# Altium PCB EVB_MBD_AK376xE_V1.0.0.PcbDoc (part 4 of 5)
Units mil, origin at the board's own origin, x right, y up, seen from the top; angles counter-clockwise.
Board outline 7060.01 x 5460.01 mil, 4 copper layers (Top, Layer 1, Layer 2, Bottom), stack 5.512 mil thick; 344 components, 305 nets, 1421 pads, 1325 vias.
Unrouted connection lines stored in the file: 947.
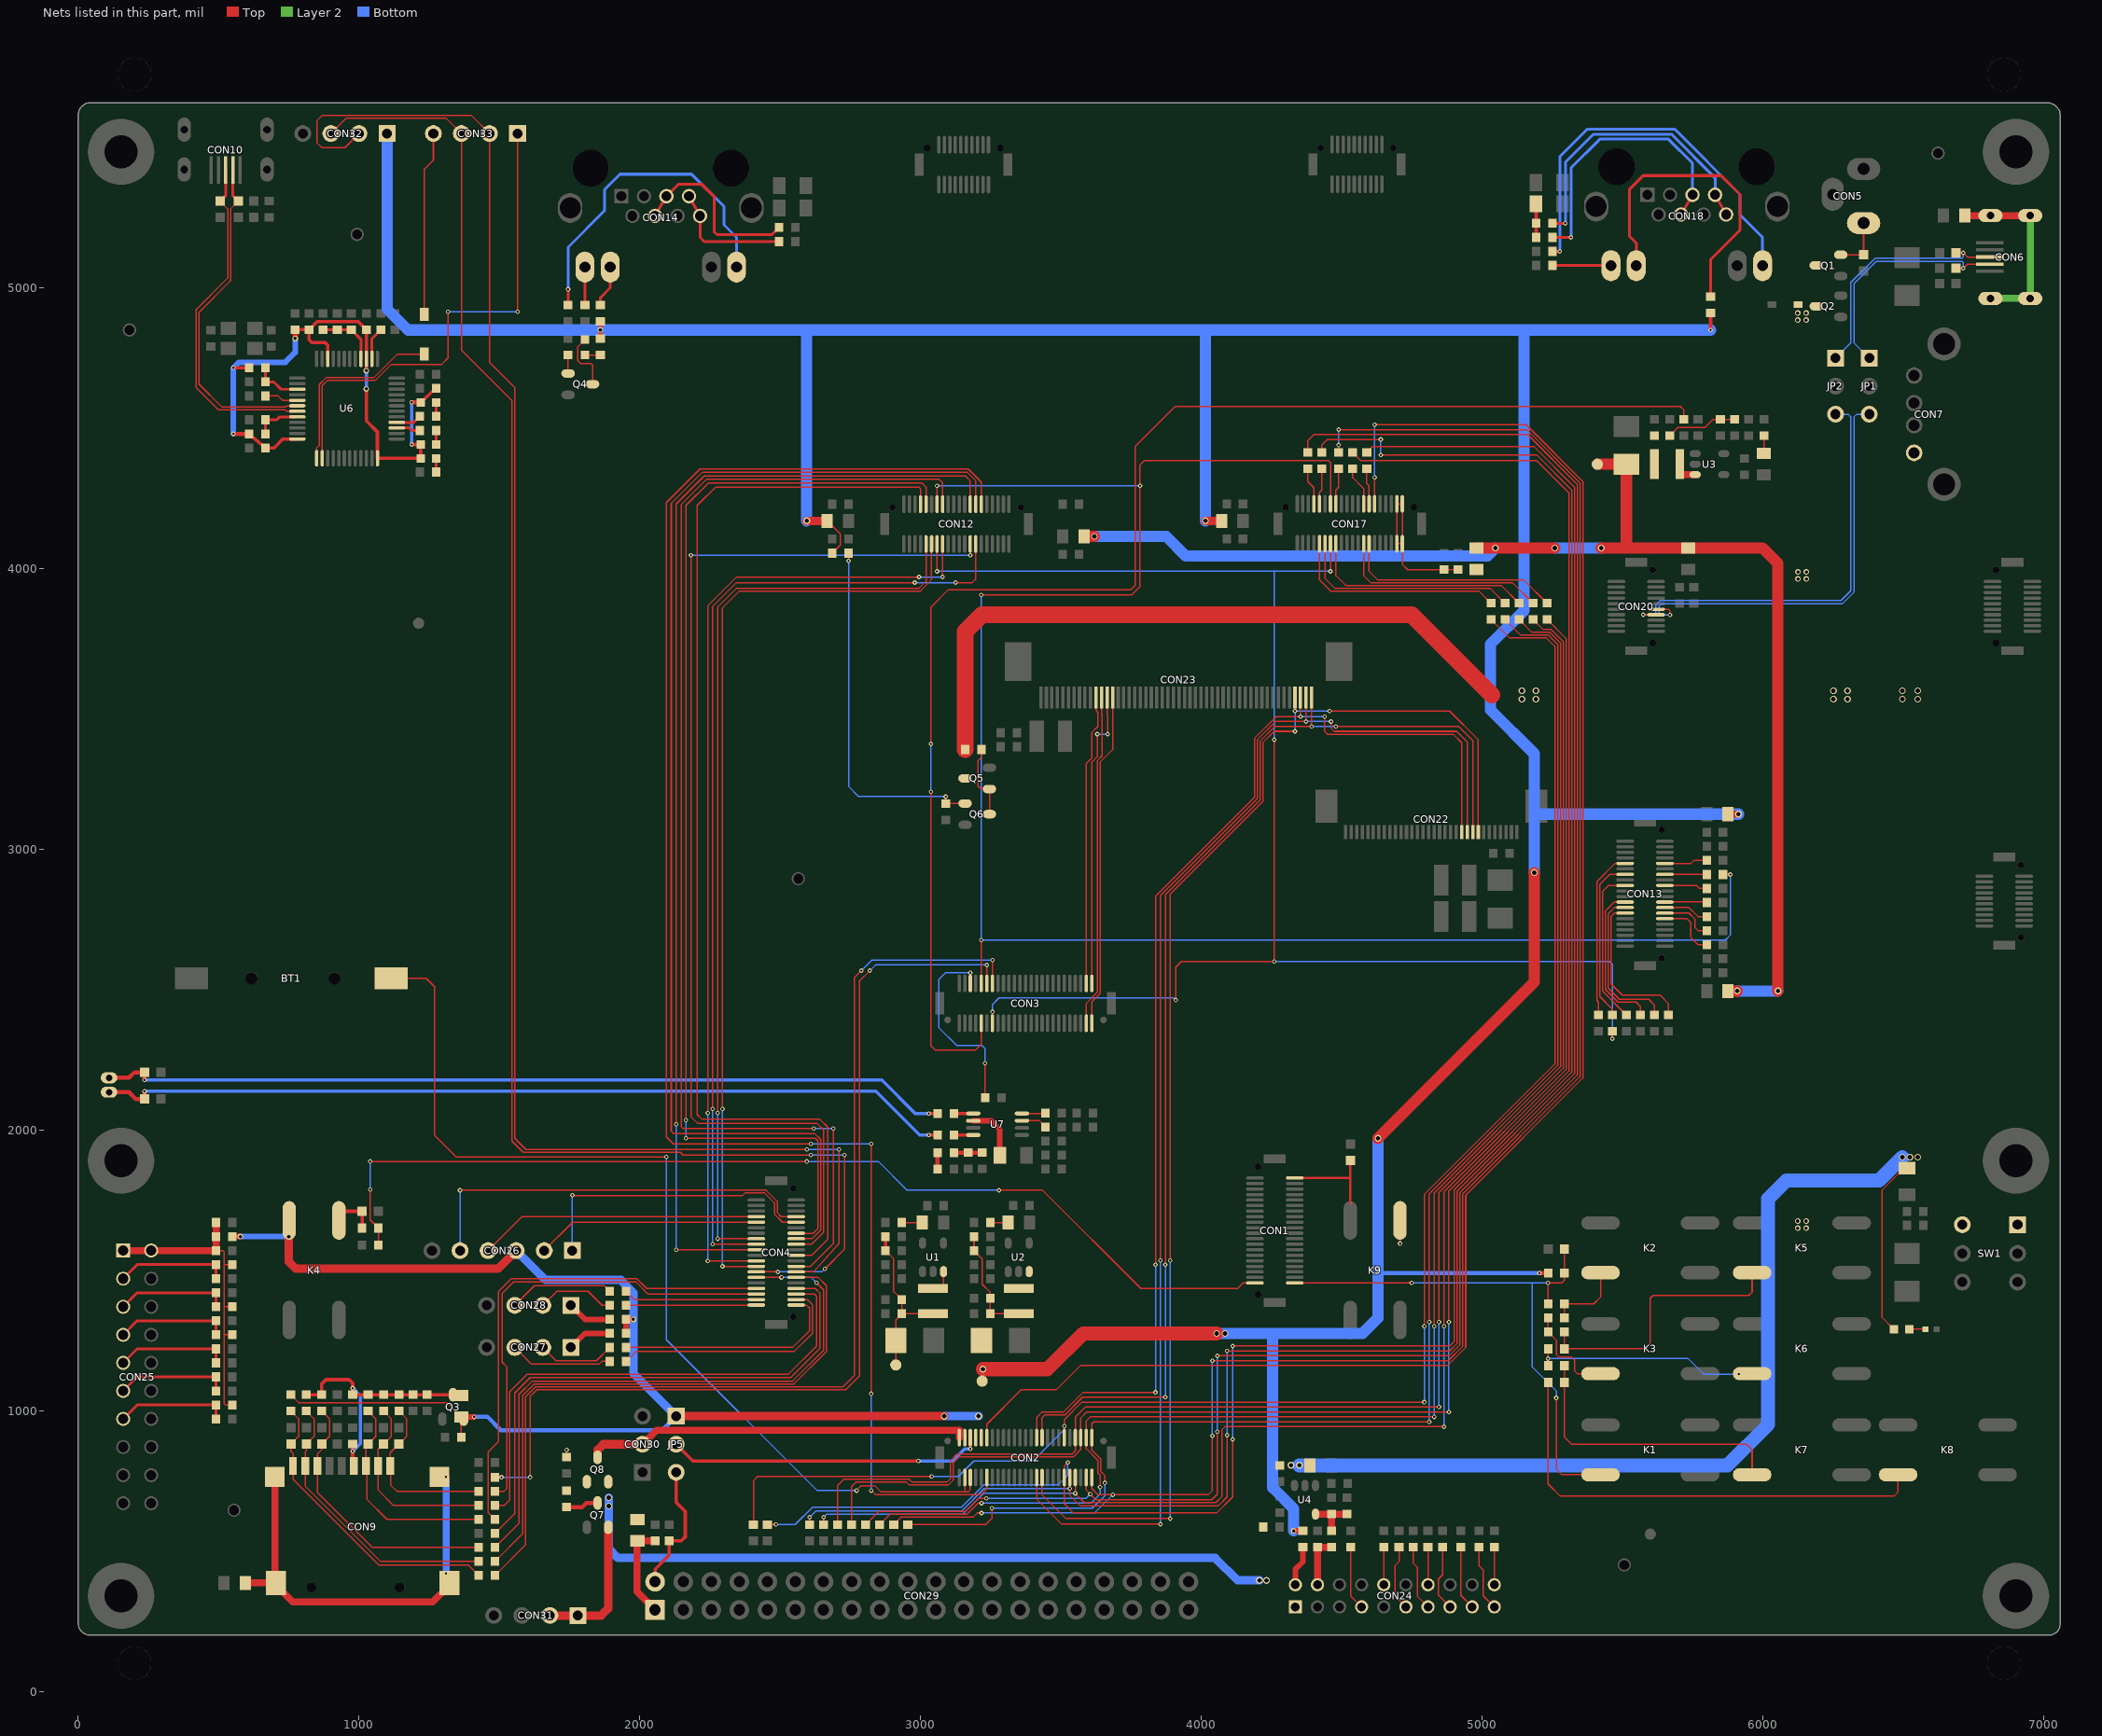
[diagram p6: the nets of this part, all layers, seen from the top]

## Via types
v1: diameter 15.75, hole 7.87, Top to Bottom, 1261 vias
v2: diameter 24, hole 16, Top to Bottom, 43 vias
v3: diameter 20, hole 12, Top to Bottom, 21 vias

## Nets (pads, with @x,y where several pads share a name; then routed paths per layer and width w, separated by ;. In a path a pad name is that pad's centre, name@x,y a point inside that pad or via, vN(x,y) a via of type N, cw(c..) or ccw(c..) an arc to the next point about the centre after c; other vN are vias at no path point) (continued)
NETC72_1: C72.1 C73.1 CON17.37 CON17.38 CON17.39 CON17.40 FB23.2 | length 602.7
  Top w5: CON17.39@4716.58,4088.58 CON17.37@4696.89,4088.58 CON17.38@4696.89,4230.32 CON17.40@4716.58,4230.32 4716.57,4015 4735.57,3996 C73.1@4865,3996 C72.1@4915,3996
NETC74_1: C74.1 R83.1 R84.1 | length 120.4
  Top w12: C74.1@5192.5,5300 5193.5,5299 R84.1@5193.5,5230 R83.1@5193.5,5180
NETC82_1: C82.1 CON24.4 FB27.1 | length 184.7
  Top w25: CON24.4@4414.41,379.37 C82.1@4414.41,513.5 FB27.1@4465,513.5
NETC84_1: C84.1 C85.1 CON25.1 CON25.2 FB25.2 R87.2 R88.2 R89.2 R90.2 | length 1120.1
  Top w5: C85.1@491,1570 515,1570 520,1565 520,1520 ; R90.2@549,1020 525,1020 520,1025 520,1270 ; R89.2@549,1270 520,1270 ; R88.2@549,1370 520,1370 ; R87.2@549,1520 520,1520 ; 520,1270 520,1370 ; 520,1370 520,1520
  Top w25: CON25.1@160,1570 CON25.2@260,1570 C85.1@491,1570 FB25.2@491,1620 C84.1@491,1670
NETC86_1: C86.1 CON1.2 R116.2 | length 3656.8
  Top w5: v1(1040,1787.5) 1040,1679 R116.2@1069,1650 C86.1@1069,1590 ; v1(1040,1887.5) v1(2595,1887.5) ; v1(3280,1785) 3435,1785 3785,1435 4130.26,1435 4150,1454.74 CON1.2@4191.63,1454.74
  Bottom w5: v1(1040,1787.5) v1(1040,1887.5) ; v1(2595,1887.5) 2850,1887.5 2952.5,1785 v1(3280,1785)
NETC88_2: C88.2 CON29.1 FB28.2 | length 336.8
  Top w25: CON29.1@2055,290 1990,355 1990,501.66 1990,534 FB28.2@1992,536 C88.2@2055,536
NETCON1_1: CON1.1 E19.1 K1.1 R108.1 R135.2 | length 2014.9
  Top w5: CON1.1@4333.37,1454.74 v1(4750,1454.74) ; R135.2@5236,1380 v1(5236,1454.74) 5284.66,1454.74 5294,1463.94 R108.1@5294,1490 E19.1@5294,1575 ; v1(5265,1045) 5265,791.42 5285,771.42 K1.1@5422.83,771.42
  Bottom w5: v1(4750,1454.74) 5180,1454.74 ; v1(5236,1454.74) 5200,1454.74 5180,1454.74 ; v1(5265,1045) 5265,1070 5180,1155 5180,1454.74
NETCON2_39: CON2.39 R69.2 R134.2 | length 7549.3
  Top w5: R134.2@2455,594 v1(2485,594) ; v1(3525,815) 3512.3,802.3 CON2.39@3512.3,761.63 3512.3,667.7 3545,635 4055,635 4112.5,692.5 v1(4112.5,897.5) ; v1(4112.5,1230) 4885,1230 4902.5,1247.5 4902.5,1787.5 5320,2205 5320,4280 5195,4405 v1(4640,4405) ; R69.2@4430,4414 4430,4440 4450,4460 v1(4640,4460)
  Bottom w5: v1(2485,594) 2554,594 2615,655 3145,655 3225,735 3490,735 3525,770 v1(3525,815) ; v1(4112.5,897.5) v1(4112.5,1230) ; v1(4640,4405) v1(4640,4460)
NETCON2_40: CON2.40 R70.2 R133.2 | length 5918.1
  Top w5: R133.2@2405,594 2405,750 2420,765 v1(3040,765) ; v1(3512.3,945) CON2.40@3512.3,903.37 3512.3,967.3 3575,1030 v1(4795,1030) ; v1(4795,1300) 4795,1770 5260,2235 5260,3722.5 5230,3752.5 5098.5,3752.5 R70.2@5032.5,3818.5
  Bottom w5: v1(3040,765) 3135,765 3190,820 3400,820 3512.3,932.3 v1(3512.3,945) ; v1(4795,1030) v1(4795,1300)
NETCON2_41: CON2.41 R79.2 R132.2 | length 7031.7
  Top w5: R132.2@2605,594 v1(2605,620) ; CON2.41@3531.99,761.63 v1(3532,722) 3531.99,698.01 3570,660 4060,660 4092.5,692.5 v1(4092.5,912.5) ; v1(4092.5,1212.5) 4885,1212.5 4912.5,1240 4912.5,1782.5 5330,2200 5330,4290 5185,4435 4611,4435 R79.2@4590,4414
  Bottom w5: v1(2605,620) 2627.5,642.5 3147.5,642.5 3227,722 v1(3532,722) ; v1(4092.5,912.5) v1(4092.5,1212.5)
NETCON2_43: CON2.43 R80.2 R131.2 | length 5676.4
  Top w5: R131.2@2655,594 v1(2655,620) ; CON2.43@3551.67,761.63 3551.67,730.14 v1(3551.67,705) 3584.17,672.5 4052.5,672.5 4075,695 4075,932.5 4085,942.5 v1(4865,942.5) ; v1(4865,1300) 4865,1780 5300,2215 5300,3751 R80.2@5232.5,3818.5
  Bottom w5: v1(2655,620) 2665,630 3150,630 3225,705 v1(3551.67,705) ; v1(4865,942.5) v1(4865,1300)
NETCON2_44: CON2.44 R78.2 R130.2 | length 5564.4
  Top w5: R130.2@2705,594 2705,732.5 2727.5,755 2960,755 2970,745 3095,745 3107.5,757.5 3107.5,822.5 3130,845 3540,845 3551.67,856.67 CON2.44@3551.67,903.37 3551.67,976.67 3587.5,1012.5 v1(4847.5,1012.5) ; v1(4847.5,1315) 4847.5,1777.5 5290,2220 5290,3740 5247.5,3782.5 5218.5,3782.5 R78.2@5182.5,3818.5
  Bottom w5: v1(4847.5,1012.5) v1(4847.5,1315)
NETCON2_46: CON2.46 R77.2 R129.2 | length 6765.8
  Top w5: R129.2@2755,594 2755,730 2770,745 2950,745 2960,735 3100,735 3117.5,752.5 3117.5,815 3137.5,835 3545,835 3571.36,861.36 CON2.46@3571.36,903.37 3571.36,973.86 3592.5,995 v1(4882.5,995) ; R77.2@4540,4414 4569,4385 5195,4385 5310,4270 5310,2210 4882.5,1782.5 v1(4882.5,1315)
  Bottom w5: v1(4882.5,995) v1(4882.5,1315)
NETCON2_47: CON2.47 R68.2 R128.2 | length 7074.8
  Top w5: R128.2@2805,594 2851,640 3160,640 3207.5,687.5 v1(3235,687.5) ; CON2.47@3591.04,761.63 3591.04,716.46 v1(3605,702.5) 3625,682.5 4037.5,682.5 4057.5,702.5 v1(4057.5,925) ; v1(4057.5,1195) 4882.5,1195 4922.5,1235 4922.5,1777.5 5340,2195 5340,4300 5162.5,4477.5 4402.5,4477.5 4380,4455 R68.2@4380,4414
  Bottom w5: v1(3235,687.5) 3590,687.5 v1(3605,702.5) ; v1(4057.5,925) v1(4057.5,1195)
NETCON2_48: CON2.48 R75.2 R127.2 | length 5482
  Top w5: R127.2@2855,594 2891,630 3165,630 3205,670 v1(3217.5,670) ; v1(3640,727.5) 3640,770 3632.5,777.5 3632.5,822.5 3591.04,863.96 CON2.48@3591.04,903.37 3591.04,963.54 3605,977.5 v1(4830,977.5) ; v1(4830,1300) 4830,1775 5280,2225 5280,3735 5242.5,3772.5 5178.5,3772.5 R75.2@5132.5,3818.5
  Bottom w5: v1(3217.5,670) 3607.5,670 3640,702.5 v1(3640,727.5) ; v1(4830,977.5) v1(4830,1300)
NETCON2_49: CON2.49 R74.2 R126.2 | length 6952.7
  Top w5: R126.2@2905,594 2931,620 3187.5,620 3202.5,635 v1(3217.5,635) ; CON2.49@3610.73,761.63 3610.73,721.77 3632.5,700 v1(3685,700) 4025,700 4040,715 v1(4040,910) ; v1(4040,1177.5) 4880,1177.5 4932.5,1230 4932.5,1772.5 5350,2190 5350,4305 5160,4495 v1(4490,4495) ; R74.2@4490,4414 v1(4490,4440)
  Bottom w5: v1(3217.5,635) 3620,635 v1(3685,700) ; v1(4040,910) v1(4040,1177.5) ; v1(4490,4440) v1(4490,4495)
NETCON2_50: CON2.50 R71.2 R125.2 | length 5429.8
  Top w5: R125.2@2955,594 3232.5,594 3255,616.5 v1(3255,652.5) ; v1(3657.5,742.5) 3657.5,767.5 3642.5,782.5 3642.5,827.5 3610.73,859.27 CON2.50@3610.73,903.37 3610.73,953.23 3617.5,960 v1(4812.5,960) ; v1(4812.5,1315) 4812.5,1772.5 5270,2230 5270,3730 5237.5,3762.5 5138.5,3762.5 R71.2@5082.5,3818.5
  Bottom w5: v1(3255,652.5) 3612.5,652.5 3657.5,697.5 v1(3657.5,742.5) ; v1(4812.5,960) v1(4812.5,1315)
NETCON5_1: CON5.1 E1.1 Q1.S | length 194.4
  Top w5: Q1.S@6278.5,5118 E1.1@6360,5118 CON5.1@6360,5230.87
NETCON9_1: CON9.1 E5.1 R13.1 R20.2 | length 622.3
  Top w5: R13.1@1142.5,998.5 1170,971 1170,908.5 E5.1@1142.5,881 1111.52,850.02 CON9.1@1111.52,803.07 1112.5,802.09 1112.5,735 1135,712.5 R20.2@1426,712.5
NETCON9_2: CON9.2 E6.1 R14.1 R21.2 | length 693.3
  Top w5: R14.1@1087.5,998.5 1115,971 1115,908.5 E6.1@1087.5,881 1068.21,861.71 CON9.2@1068.21,803.07 1067.5,802.36 1067.5,717.5 1122.5,662.5 R21.2@1426,662.5
NETCON9_3: CON9.3 E7.1 R15.1 R22.2 | length 769
  Top w5: R15.1@1032.5,998.5 1060,971 1060,908.5 E7.1@1032.5,881 1024.9,873.4 CON9.3@1024.9,803.07 1027.5,800.47 1027.5,685 1100,612.5 R22.2@1426,612.5
NETCON9_7: CON9.7 E9.1 R17.1 R25.2 | length 975
  Top w5: R17.1@867.5,998.5 895,971 895,915 895,908.5 E9.1@867.5,881 867.5,860.83 851.67,845 CON9.7@851.67,803.07 852.5,802.24 852.5,707.5 1047.5,512.5 R25.2@1426,512.5
NETCON9_8: CON9.8 E10.1 R18.1 R26.2 | length 1020.5
  Top w5: R18.1@812.5,998.5 840,971 840,908.5 E10.1@812.5,881 812.5,856.63 808.37,852.5 CON9.8@808.37,803.07 808.37,731.63 1077.5,462.5 R26.2@1426,462.5
NETCON9_9: CON9.9 E11.1 R19.1 R28.2 | length 1072.3
  Top w5: R19.1@757.5,998.5 785,971 785,908.5 E11.1@757.5,881 757.5,855.06 765.06,847.5 CON9.9@765.06,803.07 765,803.01 765,755 1070,450 1388.5,450 R28.2@1426,412.5
NETCON9_10: CON9.10 CON9.11 CON9.12 CON9.13 FB8.1 | length 1539
  Top w25: FB8.1@595.5,385.75 CON9.13@704.03,385.75 ; CON9.10@700.1,763.7 700.1,389.69 CON9.13@704.04,385.75 ; CON9.11@1286.71,763.7 v1(1310,763.7) ; CON9.12@1322.15,385.75 1322.15,377.15 1263.03,318.03 763.88,318.03 704.04,377.87 CON9.13@704.04,385.75
  Bottom w25: v1(1310,420) v1(1310,763.7)
NETCON11_1: CON11.1 E15.1 FB12.2 | length 3053.5
  Top w12: v1(3030,1981.61) FB12.2@3061,1981.61
  Top w15: CON11.1@109.69,2134.41 180.59,2134.41 205,2110 E15.1@236,2110 v1(236,2137.5)
  Bottom w12: v1(236,2137.5) 2841.61,2137.5 2997.5,1981.61 v1(3030,1981.61)
NETCON11_2: CON11.2 E16.1 FB13.2 | length 3036.2
  Top w12: v1(3030,2058.39) FB13.2@3061,2058.39
  Top w15: CON11.2@109.69,2185.59 180.59,2185.59 200,2205 E16.1@236,2205 v1(236,2177.5)
  Bottom w12: v1(236,2177.5) 2862.5,2177.5 2981.61,2058.39 v1(3030,2058.39)
NetCON13_9: CON13.9 R47.2 | length 605.1
  Top w5: R47.2@5415,2409 5415,2455 5410,2460 5410,2885 5474.61,2949.61 CON13.9@5510.26,2949.61
NetCON13_10: CON13.10 R46.1 | length 153.3
  Top w5: CON13.10@5652,2949.61 5745,2949.61 5755.39,2960 R46.1@5801,2960
NetCON13_13: CON13.13 R49.2 | length 589.5
  Top w5: R49.2@5465,2409 5465,2430 5420,2475 5420,2875 5455.24,2910.24 CON13.13@5510.26,2910.24
NetCON13_14: CON13.14 R48.1 | length 149.1
  Top w5: CON13.14@5652,2910.24 5800.76,2910.24 R48.1@5801,2910
NetCON13_17: CON13.17 R52.2 | length 565.1
  Top w5: CON13.17@5510.26,2870.87 5450.87,2870.87 5430,2850 5430,2494 R52.2@5515,2409
NetCON13_18: CON13.18 R51.1 | length 153.5
  Top w5: CON13.18@5652,2870.87 5765,2870.87 5775.87,2860 R51.1@5801,2860
NetCON13_23: CON13.23 R60.2 | length 544.3
  Top w5: CON13.23@5510.26,2811.81 5471.82,2811.82 5440,2780 5440,2500 5485,2455 5550,2455 5565,2440 R60.2@5565,2409
NetCON13_24: CON13.24 R59.1 | length 149.8
  Top w5: CON13.24@5652,2811.81 5799.18,2811.82 R59.1@5801,2810
NetCON13_25: CON13.25 R62.2 | length 560.3
  Top w5: CON13.25@5510.26,2792.13 5472.13,2792.13 5450,2770 5450,2505 5490,2465 5595,2465 5615,2445 R62.2@5615,2409
NetCON13_26: CON13.26 R61.1 | length 162.3
  Top w5: CON13.26@5652,2792.13 5737.87,2792.13 5770,2760 R61.1@5801,2760
NetCON13_27: CON13.27 R64.2 | length 570.4
  Top w5: CON13.27@5510.26,2772.44 5472.45,2772.45 5460,2760 5460,2520 5500,2480 5635,2480 5665,2450 R64.2@5665,2409
NetCON13_28: CON13.28 R63.1 | length 192.4
  Top w5: CON13.28@5652,2772.44 5737.55,2772.45 5760,2750 5760,2720 5770,2710 R63.1@5801,2710
NetCON13_30: CON13.30 R65.1 | length 218.3
  Top w5: CON13.30@5652,2752.76 5730,2752.76 5745,2737.76 5745,2685 5770,2660 R65.1@5801,2660
NETCON14_4: CON14.4 CON14.5 R66.2 | length 657.8
  Top w10: CON14.4@2054.53,5256.47 CON14.5@2095.48,5326.55 2138.92,5370 2220,5370 2265,5325 2265,5200 2275,5190 2471,5190 R66.2@2496,5215
NETCON14_7: CON14.7 CON14.8 R67.2 | length 444
  Top w10: CON14.7@2175.79,5326.55 CON14.8@2215.16,5256.47 2215.16,5179.84 2230,5165 R67.2@2496,5165
NETCON14_13: CON14.13 R50.2 | length 135.2
  Top w10: R50.2@1804.92,4939 CON14.13@1804.92,5074.19
NETCON14_14: CON14.14 FB17.2 | length 149.7
  Top w10: FB17.2@1860,4939 1860,4964.92 1895.08,5000 CON14.14@1895.08,5074.19
NETCON14_16: CON14.16 R58.2 | length 1194.7
  Top w10: R58.2@1745,4939 v1(1745,4995)
  Bottom w10: v1(1745,4995) 1745,5145 1875,5275 1875,5350 1930,5405 2185,5405 2300,5290 2300,5225 2345.08,5179.92 CON14.16@2345.08,5074.19
NETCON18_4: CON18.4 CON18.5 R83.2 | length 1018.5
  Top w10: R83.2@5251.5,5180 v1(5317.5,5180) ; CON18.4@5709.53,5261.47 CON18.5@5750.48,5331.55
  Bottom w10: v1(5317.5,5180) 5317.5,5427.5 5420,5530 5665,5530 5750.48,5444.52 CON18.5@5750.48,5331.55
NETCON18_7: CON18.7 CON18.8 R84.2 | length 1043.3
  Top w10: R84.2@5251.5,5230 v1(5297.5,5230) ; CON18.7@5830.79,5331.55 CON18.8@5870.16,5261.47
  Bottom w10: v1(5297.5,5230) 5297.5,5447.5 5397.5,5547.5 5675,5547.5 5830.79,5391.71 CON18.7@5830.79,5331.55
NETCON18_13: CON18.13 R76.2 | length 208.8
  Top w10: R76.2@5251.5,5080 5459.11,5080 CON18.13@5459.92,5079.19
NETCON18_14: CON18.14 FB21.2 | length 1131.9
  Top w10: CON18.14@5550.08,5079.19 5550.08,5159.92 5525,5185 5525,5350 5575,5400 5852.5,5400 5920,5332.5 5920,5206 5815,5101 FB21.2@5815,4969
NETCON18_16: CON18.16 R81.2 | length 1429.2
  Top w10: R81.2@5251.5,5130 v1(5277.5,5130)
  Bottom w10: v1(5277.5,5130) 5277.5,5467.5 5375,5565 5687.5,5565 5920,5332.5 5920,5260.08 6000.08,5180 CON18.16@6000.08,5079.19
NETCON24_2: CON24.2 FB26.1 | length 145.2
  Top w20: CON24.2@4335.67,379.37 4335.67,435 4362.5,461.83 FB26.1@4362.5,513.5
NETCON24_7: CON24.7 R92.1 | length 229.2
  Top w5: R92.1@4532.5,513.5 4532.5,340.02 CON24.7@4571.89,300.63
NETCON24_10: CON24.10 R94.2 | length 134.1
  Top w5: CON24.10@4650.63,379.37 4650.63,385 R94.2@4650.63,513.5
NETCON24_11: CON24.11 R96.1 | length 235.4
  Top w5: R96.1@4705,513.5 4705,462.5 4690,447.5 4690,340 CON24.11@4729.37,300.63
NETCON24_13: CON24.13 R98.1 | length 234.9
  Top w5: R98.1@4755,513.5 4755,457.5 4770,442.5 4770,338.74 CON24.13@4808.11,300.63
NETCON24_14: CON24.14 R99.2 | length 134.1
  Top w5: CON24.14@4808.11,379.37 R99.2@4808.11,513.5
NETCON24_15: CON24.15 R101.1 | length 236.4
  Top w5: R101.1@4860,513.5 4860,415 4845,400 4845,342.48 CON24.15@4886.85,300.63
NETCON24_17: CON24.17 R103.1 | length 229.7
  Top w5: R103.1@4925,513.5 4925,341.22 CON24.17@4965.59,300.63
NETCON24_19: CON24.19 R104.1 | length 235.4
  Top w5: R104.1@4990,513.5 4990,447.5 5005,432.5 5005,339.96 CON24.19@5044.33,300.63
NETCON24_20: CON24.20 R105.2 | length 134.1
  Top w5: CON24.20@5044.33,379.37 R105.2@5044.33,513.5
NETCON25_3: CON25.3 R87.1 R91.1 | length 401.7
  Top w10: CON25.3@160,1470 210,1520 R87.1@491,1520 R91.1@491,1470
NETCON25_5: CON25.5 R88.1 R93.1 | length 401.7
  Top w10: CON25.5@160,1370 210,1420 R93.1@491,1420 R88.1@491,1370
NETCON25_7: CON25.7 R89.1 R95.1 | length 401.7
  Top w10: CON25.7@160,1270 210,1320 R95.1@491,1320 R89.1@491,1270
NETCON25_9: CON25.9 R97.1 R107.2 | length 401.7
  Top w10: CON25.9@160,1170 210,1220 R97.1@491,1220 R107.2@491,1170
NETCON25_11: CON25.11 R100.1 R106.2 | length 401.7
  Top w10: CON25.11@160,1070 210,1120 R100.1@491,1120 R106.2@491,1070
NETCON25_13: CON25.13 R90.1 R102.1 | length 401.7
  Top w10: CON25.13@160,970 210,1020 R90.1@491,1020 R102.1@491,970
NETCON27_1: CON27.1 R111.2 | length 159.2
  Top w20: CON27.1@1755,1225 1805,1275 R111.2@1893.5,1275
NETCON27_2: CON27.2 R112.2 | length 277.9
  Top w5: CON27.2@1655,1225 1702.5,1177.5 1846,1177.5 R112.2@1893.5,1225
NETCON27_3: CON27.3 R113.2 | length 367.5
  Top w5: CON27.3@1555,1225 1615,1165 1855,1165 1865,1175 R113.2@1893.5,1175
NETCON28_1: CON28.1 R117.2 | length 159.2
  Top w20: CON28.1@1755,1375 1805,1325 R117.2@1893.5,1325
NETCON28_2: CON28.2 R118.2 | length 279.9
  Top w5: CON28.2@1655,1375 1705,1425 1816,1425 1866,1375 R118.2@1893.5,1375
NETCON28_3: CON28.3 R119.2 | length 375.8
  Top w5: CON28.3@1555,1375 1625,1445 1873.5,1445 R119.2@1893.5,1425
NETCON31_1: CON31.1 CON31.2 Q7.S | length 507.4
  Top w30: CON31.2@1680,270 CON31.1@1780,270 1863,270 1888,295 Q7.S@1888,584
NETD1_K: D1.K R4.1 | length 57.5
  Top w5: D1.K@6522.5,1290 R4.1@6580,1290
NETD2_2: D2.2 Q1.D Q2.D SW1.1 SW1.4
  other v3: 6125.12,1650 6155.12,1650 6125.12,1675 6155.12,1675 6125.97,3962.83 6155.97,3962.83 6125.97,3987.83 6155.97,3987.83 6125,4885 6155,4885 6125,4910 6155,4910
NETD3_K: D3.K U6.13 | length 685.8
  Top w5: U6.13@849.23,4392.83 849.23,4430 858.37,4439.13 858.37,4655.87 882.5,4680 1052.5,4680 1136.63,4764.13 D3.K@1232.5,4764.13
NETD4_K: D4.K R34.2 | length 48.8
  Top w10: R34.2@1275,4344 D4.K@1275,4392.83
NETD5_K: D5.K R35.2 | length 50
  Top w10: R35.2@1274.5,4542 D5.K@1274.5,4592
NETD6_K: D6.K R33.2 | length 50
  Top w10: D6.K@1274.5,4442 R33.2@1274.5,4492
NETD7_A: D7.A R85.1 | length 55
  Top w5: D7.A@1805,4761 R85.1@1860,4761
NETD7_K: D7.K Q4.C | length 212.6
  Top w5: D7.K@1805,4816 1780,4791 1780,4740 1790,4730 1827,4730 1832,4725 Q4.C@1832,4657
NETE20_1: E20.1 K4.1 R116.1 | length 175.3
  Top w12: 928.58,1677.17 928.58,1710 E20.1@1011,1710 R116.1@1011,1650
NETFB12_1: FB12.1 U7.8 | length 69.4
  Top w12: FB12.1@3119,1981.61 U7.8@3188.39,1981.61
NETFB13_1: FB13.1 U7.5 | length 69.4
  Top w12: FB13.1@3119,2058.39 U7.5@3188.39,2058.39
NETK2_1: K2.1 R135.1 R136.2 | length 276
  Top w5: R136.2@5294,1330 R135.1@5294,1380 5398.48,1380 5422.83,1404.36 K2.1@5422.83,1491.42
NETK3_1: K3.1 R136.1 R137.2 | length 350.9
  Top w5: R136.1@5236,1330 R137.2@5236,1280 5265,1251 5265,1200 5275,1190 5320,1190 5330,1180 5330,1141.42 5340,1131.42 K3.1@5422.83,1131.42
NETK5_1: K5.1 R137.1 R138.2 | length 975.5
  Top w5: R137.1@5294,1280 R138.2@5294,1220 5580,1220 5600,1240 5600,1400 5610,1410 5950.57,1410 5962.83,1422.27 K5.1@5962.83,1491.42
NETK6_1: K6.1 R138.1 R139.2 | length 761.8
  Top w5: R139.2@5236,1160 v1(5236,1185) R138.1@5236,1220
  Bottom w5: v1(5236,1185) 5735,1185 5790,1130 v1(5915,1130)
NETK7_1: K7.1 R139.1 R140.2 | length 1030.5
  Top w5: R139.1@5294,1160 R140.2@5294,1100 5294,906 5320,880 5942.83,880 5962.83,860 K7.1@5962.83,771.42
NETK8_1: K8.1 R140.1 | length 1693.7
  Top w5: R140.1@5236,1100 5236,739 5280,695 6467.83,695 6482.83,710 K8.1@6482.83,771.42
NETL1_1: L1.1 U1.3 | length 97.1
  Top w5: L1.1@3045,1435.28 3082.4,1435.28 U1.3@3082.4,1495
NETL2_1: L2.1 U2.3
NETL3_1: L3.1 U3.3 | length 92.1
  Top w25: L3.1@5705.28,4371.9 5705.28,4334.5 U3.3@5760,4334.5
NETQ4_B: Q4.B R86.1 | length 66
  Top w5: Q4.B@1745,4695 R86.1@1745,4761
NETQ5_G: Q5.G Q6.C R122.2 | length 269.8
  Top w5: R122.2@3217,3355 3217,3327 3205,3315 3205,3225 3215.5,3214.5 Q5.G@3246,3214.5 Q6.C@3246,3125
NETQ6_B: Q6.B R123.2 R124.2 | length 1285.9
  Top w5: v1(2744,4027.5) R123.2@2744,4055 ; v1(3090,3187.5) R124.2@3090,3163 Q6.B@3159,3163
  Bottom w5: v1(2744,4027.5) 2744,3223.5 2780,3187.5 v1(3090,3187.5)
NetQ8_G: Q8.G R141.2 R143.2 | length 26
  Top w5: R141.2@1740,834 v1(1740,860)
NETR32_2: R32.2 U6.5 | length 120.2
  Top w5: R32.2@666.5,4615 712.03,4615 727.5,4599.53 U6.5@780.33,4599.53
NETR33_1: R33.1 U6.27 | length 85.6
  Top w10: U6.27@1134.67,4501.1 1178.4,4501.1 1187.5,4492 R33.1@1216.5,4492
NETR35_1: R35.1 U6.28 | length 91.3
  Top w10: U6.28@1134.67,4520.79 1135.45,4520 1194.5,4520 R35.1@1216.5,4542
NETR36_1: R36.1 U7.3 | length 93.8
  Top w5: U7.3@3361.61,2032.8 3423.2,2032.8 R36.1@3446,2010
NETR37_1: R37.1 U7.4 | length 85.1
  Top w5: U7.4@3361.61,2058.39 3444.39,2058.39 R37.1@3446,2060
POWER_IN: C55.1 C83.2 CON7.1 CON24.1 D1.A F1.2 FB1.1 FB2.1 FB4.1 FB5.1 FB14.1 FB28.1 Q5.D Q7.D Q8.S R1.2 R5.2 R8.2 R12.2 R122.1 R143.1 | length 9067
  Top w5: R1.2@2934,1670 FB1.1@3006.4,1670 ; R5.2@3249,1670 FB2.1@3312,1670 ; FB4.1@6005,4410.5 R8.2@6005,4473.5 ; D1.A@6467.5,1290 6425,1332.5 6425,1784.5 6505,1864.5 F1.2@6515,1864.5
  Top w15: 1740,656 1795,656 1810,671 Q7.D@1850,671 ; C55.1@3061,1861 FB14.1@3061,1919
  Top w60: R122.1@3159,3355 3159,3775 3219,3835 4750,3835 5035,3550
  Bottom w30: v2(1890,690) 1890,507.5 1922.5,475 4050,475 4130,395 v2(4207.5,395)
  Bottom w50: v2(4350,805) 5875,805 6020,950 6020,1755 6085,1820 6415,1820 v2(6497.5,1902.5)
  other v2: 4232.5,395 1890,660 4320,805 6525,1902.5 6552.5,1902.5 5142.5,3535 5192.5,3535 6252.5,3535 6302.5,3535 6497.5,3535 6552.5,3535 5142.5,3565 5192.5,3565 6252.5,3565 6302.5,3565 6497.5,3565 6552.5,3565
RE_BOOT: CON1.39 E25.1 K9.2 | length 434.3
  Top w5: v1(4708.58,1595) K9.2@4708.58,1677.17
  Top w8: CON1.39@4333.37,1828.76 4530.93,1828.76 4531.42,1829.25 ; 4531.42,1737.17 4531.42,1829.25 ; E25.1@4531.42,1891 4531.42,1860 4531.42,1829.25
RGB_PCLK/MPU_WR: CON3.3 CON23.11 | length 1038.1
  Top w5: CON3.3@3591.04,2521.87 3591.04,2558.96 3591.04,3306.04 3611.25,3326.25 3611.25,3416.25 3632.5,3437.5 3632.5,3487.5 3625.7,3494.3 CON23.11@3625.7,3540
RGB_VOGATE/MPU_RD: CON3.2 CON23.14 | length 1190.5
  Top w5: CON3.2@3610.73,2380.14 3610.73,2455.73 3640,2485 3640,3310 3684.75,3354.75 CON23.14@3684.75,3540
RGB_VOHSYNC/MPU_CS: CON3.4 CON23.12 | length 1184.1
  Top w5: CON3.4@3591.04,2380.14 3591.04,2451.04 3630,2490 3630,3315 3647.5,3332.5 3647.5,3477.5 3645.38,3479.62 CON23.12@3645.38,3540
RGB_VOVSYNC/MPU_A0: CON3.1 CON23.13 | length 1064.6
  Top w5: CON3.1@3610.73,2521.87 3610.73,3310.73 3630,3330 v1(3630,3410) ; CON23.13@3665.07,3540 3665.06,3489.95 3665.06,3482.44 3667.5,3480 v1(3667.5,3410)
  Bottom w5: v1(3630,3410) v1(3667.5,3410)
RMII0_50MCLK: CON4.22 CON12.8 | length 4069.9
  Top w5: CON4.22@2557.39,1553.17 2613.17,1553.17 2670,1610 2670,2010 2642.5,2037.5 2222.5,2037.5 2205,2055 2205,4225 2270,4290 2995.35,4290 3000.35,4285 CON12.8@3000.36,4229.29
RMII0_MDC: CON4.15 CON12.9 | length 3301.8
  Top w5: v1(2277.5,1612.22) CON4.15@2415.65,1612.22 ; v1(2277.5,2060) 2277.5,3862.5 2345,3930 2995,3930 3020.04,3955.04 CON12.9@3020.04,4087.55
  Bottom w5: v1(2277.5,1612.22) v1(2277.5,2060)
RMII0_MDIO: CON4.14 CON12.10 | length 4080.5
  Top w5: v1(2165,1970) 2625,1970 2635,1960 2635,1648.08 2618.83,1631.91 CON4.14@2557.39,1631.91 ; v1(2165,2035) 2165,4225 2245,4305 3005,4305 3020.04,4289.96 CON12.10@3020.04,4229.29
  Bottom w5: v1(2165,1970) v1(2165,2035)
RMII0_RST: CON2.11 CON12.30 | length 5972
  Top w5: v1(2610,1950) 2120,1950 2095,1975 2095,4235 2215,4355 3170,4355 3216.89,4308.11 CON12.30@3216.89,4229.29 ; v1(2825,715) 2840,700 3215,700 3236.71,721.71 CON2.11@3236.71,761.63 ; v1(2825,1060) v1(2825,1950)
  Bottom w5: v1(2610,1950) v1(2825,1950) ; v1(2825,715) v1(2825,1060)
RMII0_RXD0: CON4.18 CON12.25 | length 4007.5
  Top w5: v1(2182.5,4047.5) 2182.5,2047.5 2207.5,2022.5 2632.5,2022.5 2655,2000 2655,1635 2612.54,1592.54 CON4.18@2557.39,1592.54 ; v1(3177.52,4047.5) CON12.25@3177.52,4087.55
  Bottom w5: v1(2182.5,4047.5) v1(3177.52,4047.5)
RMII0_RXD1: CON4.19 CON12.26 | length 4122.2
  Top w5: v1(2130,1572.85) CON4.19@2415.65,1572.85 ; v1(2130,2020) 2130,4230 2230,4330 3160,4330 3177.52,4312.48 CON12.26@3177.52,4229.29
  Bottom w5: v1(2130,1572.85) v1(2130,2020)
RMII0_RXDV: CON4.17 CON12.27 | length 3530.8
  Top w5: v1(2260,1592.54) CON4.17@2415.65,1592.54 ; v1(2260,2075) 2260,3865 2345,3950 v1(2980,3950) ; v1(3125,3950) 3184.7,3950 3197.2,3962.5 CON12.27@3197.21,4087.55
  Bottom w5: v1(2260,1592.54) v1(2260,2075) ; v1(2980,3950) v1(3125,3950)
RMII0_RXER: CON4.16 CON12.28 | length 4430.3
  Top w5: CON4.16@2557.39,1612.22 2613.29,1612.22 2645,1643.93 2645,1965 2622.5,1987.5 2120,1987.5 2112.5,1995 2112.5,4232.5 2222.5,4342.5 3167.5,4342.5 3197.2,4312.8 CON12.28@3197.21,4229.29
RMII0_TXD0: CON4.23 CON12.15 | length 3503.8
  Top w5: v1(2242.5,1533.48) CON4.23@2415.65,1533.48 ; v1(2242.5,2060) 2242.5,3867.5 2345,3970 v1(2995,3970) ; v1(3079.09,3970) CON12.15@3079.1,4087.55
  Bottom w5: v1(2242.5,1533.48) v1(2242.5,2060) ; v1(2995,3970) v1(3079.09,3970)
RMII0_TXD1: CON4.26 CON12.16 | length 4387.2
  Top w5: CON4.26@2557.39,1513.8 2608.8,1513.8 2690,1595 v1(2690,2005) ; v1(2620,2005) 2155,2005 2147.5,2012.5 2147.5,4227.5 2237.5,4317.5 3067.5,4317.5 3079.09,4305.91 CON12.16@3079.1,4229.29
  Bottom w5: v1(2620,2005) v1(2690,2005)
RMII0_TXEN: CON4.25 CON12.11 | length 3380.7
  Top w5: v1(2295,1513.8) CON4.25@2415.65,1513.8 ; v1(2295,2075) 2295,3860 2355,3920 3000,3920 3039.72,3959.72 CON12.11@3039.73,4087.55
  Bottom w5: v1(2295,1513.8) v1(2295,2075)
RMII1_50MCLK: CON17.8 R68.1 | length 134.6
  Top w5: R68.1@4380,4356 4380,4310 4401.61,4288.39 CON17.8@4401.62,4230.32
RMII1_MDC/SD2_D0: CON17.9 R70.1 | length 774.4
  Top w5: CON17.9@4421.3,4088.58 4421.3,3960 4461.3,3920 4989,3920 R70.1@5032.5,3876.5
RMII1_MDIO/SD2_D1: CON17.10 R69.1 | length 129.3
  Top w5: CON17.10@4421.3,4230.32 4421.3,4271.3 4430,4280 R69.1@4430,4356
RMII1_RST: CON2.12 CON17.30 | length 6233.2
  Top w5: CON2.12@3236.71,903.37 3236.71,951.71 3360,1075 3485,1075 3570,1160 4877.5,1160 4942.5,1225 4942.5,1767.5 5360,2185 5360,4310 5157.5,4512.5 v1(4618.15,4512.5) ; CON17.30@4618.15,4230.32 v1(4618.15,4325)
  Bottom w5: v1(4618.15,4325) v1(4618.15,4512.5)
RMII1_RXD0/SD2_D3: CON17.25 R78.1 | length 758.1
  Top w5: CON17.25@4578.78,4088.58 4578.78,3975 4603.78,3950 5109,3950 R78.1@5182.5,3876.5
RMII1_RXD1/SD2_D2: CON17.26 R77.1 | length 141.7
  Top w5: R77.1@4540,4356 4540,4323.78 4578.78,4285 CON17.26@4578.78,4230.32
RMII1_RXDV/SD2_CMD: CON17.27 R80.1 | length 779.6
  Top w5: CON17.27@4598.47,4088.58 4598.46,3990 4628.46,3960 5149,3960 R80.1@5232.5,3876.5
RMII1_RXER/SD2_CLK: CON17.28 R79.1 | length 129.2
  Top w5: R79.1@4590,4356 4590,4303.46 4598.46,4295 CON17.28@4598.47,4230.32
RMII1_TXD0: CON17.15 R75.1 | length 806.5
  Top w5: CON17.15@4480.36,4088.58 4480.35,3975 4515.35,3940 5069,3940 R75.1@5132.5,3876.5
RMII1_TXD1: CON17.16 R74.1 | length 129.7
  Top w5: CON17.16@4480.36,4230.32 4480.35,4280 4490,4289.65 R74.1@4490,4356
RMII1_TXEN: CON17.11 R71.1 | length 801.8
  Top w5: CON17.11@4440.99,4088.58 4440.98,3965 4475.98,3930 5029,3930 R71.1@5082.5,3876.5
SPK_EN: CON3.45 R30.2 | length 703.2
  Top w5: CON3.45@3177.66,2521.87 v1(3177.66,2560) ; v1(3230,2237.5) 3230,2115 R30.2@3231,2115
  Bottom w5: v1(3177.66,2560) 3090,2560 3065,2535 3065,2365 3130,2300 3220,2300 3230,2290 v1(3230,2237.5)
TF_3V3: C27.1 C28.1 CON9.4 FB6.1 Q3.D R13.2 R14.2 R15.2 R16.2 R17.2 R18.2 R142.2 | length 974.4
  Top w12: R18.2@812.5,1056.5 R17.2@867.5,1056.5 867.5,1095 882.5,1110 965,1110 977.5,1097.5 v1(977.5,1080) R16.2@977.5,1056.5 R15.2@1032.5,1056.5 R14.2@1087.5,1056.5 R13.2@1142.5,1056.5 C27.1@1192.5,1056.5 R142.2@1242.5,1056.5 Q3.D@1335,1056.5 1362,1056.5 FB6.1@1365,1053.5 ; C28.1@977.5,881 v1(977.5,855) 977.5,803.07 CON9.4@981.59,803.07
  Bottom w12: v1(977.5,855) 1005,882.5 1005,1052.5 v1(977.5,1080)
TF_CMD: CON4.33 R22.1 | length 1789.2
  Top w5: R22.1@1484,612.5 1460,636.5 1460,852.5 1497.5,890 1497.5,1425 1542.5,1470 1990,1470 2024.94,1435.06 CON4.33@2415.65,1435.06
TF_D0: CON4.29 R25.1 | length 2203.6
  Top w5: R25.1@1484,512.5 1570,598.5 1570,1057.5 1617.5,1105 2545,1105 2655,1215 2655,1430 v1(2630,1455) ; CON4.29@2415.65,1474.43 v1(2505,1474.43)
  Bottom w5: v1(2505,1474.43) 2610.57,1474.43 v1(2630,1455)
TF_D1: CON4.30 R26.1 | length 2133.3
  Top w5: R26.1@1484,462.5 1582.5,561 1582.5,1052.5 1625,1095 2550,1095 2665,1210 2665,1445 2635.57,1474.43 2610.57,1474.43 CON4.30@2557.39,1474.43
TF_D2: CON4.35 R20.1 | length 1689.6
  Top w5: R20.1@1484,712.5 1517.5,712.5 1527.5,722.5 1527.5,1155 1510,1172.5 1510,1417.5 1550,1457.5 1987.5,1457.5 2029.63,1415.37 CON4.35@2415.65,1415.37
TF_D3: CON4.36 R21.1 | length 1860
  Top w5: R21.1@1484,662.5 1517.5,662.5 1537.5,682.5 1537.5,1067.5 1600,1130 2530,1130 2630,1230 2630,1407.5 2622.13,1415.37 CON4.36@2557.39,1415.37
TF_DET: CON3.37 R28.1 | length 3902.5
  Top w5: R28.1@1484,412.5 1592.5,521 1592.5,1047.5 1630,1085 2725,1085 2765,1125 2765,2542.5 v1(2790,2567.5) ; CON3.37@3256.4,2521.87 v1(3256.4,2605)
  Bottom w5: v1(2790,2567.5) 2827.5,2605 v1(3256.4,2605)
TF_EN: CON3.39 R27.2 | length 3567.2
  Top w5: R27.2@1484,762.5 v1(1507.5,762.5) ; v1(1610,762.5) 1610,1050 1635,1075 2735,1075 2782.5,1122.5 2782.5,2530 v1(2820,2567.5) ; CON3.39@3236.71,2521.87 v1(3236.71,2587.5)
  Bottom w5: v1(1507.5,762.5) v1(1610,762.5) ; v1(2820,2567.5) 2840,2587.5 v1(3236.71,2587.5)
TF_MCK: CON4.34 R24.1 | length 1970.6
  Top w5: R24.1@1484,562.5 1555,633.5 1555,1062.5 1610,1117.5 2537.5,1117.5 2642.5,1222.5 2642.5,1417.5 2624.94,1435.06 2594.94,1435.06 CON4.34@2557.39,1435.06
TS_INT: CON2.32 CON22.24 CON23.50 | length 4247.4
  Top w5: CON2.32@3433.56,903.37 3433.56,975 3443.56,985 3515,985 3577.5,1047.5 v1(3872.5,1047.5) ; v1(3872.5,1520) 3872.5,2837.5 4210,3175 4210,3385 4262.5,3437.5 v1(4393.41,3437.5) CON23.50@4393.41,3540 ; v1(4480,3437.5) 4917.5,3437.5 4967.5,3387.5 4967.5,3060.63 CON22.24@4967.64,3060.63
  Bottom w5: v1(3872.5,1047.5) v1(3872.5,1520) ; v1(4393.41,3437.5) v1(4480,3437.5)
TS_RST: CON2.31 CON22.25 CON23.47 | length 4730.8
  Top w5: CON2.31@3433.56,761.63 3433.56,700 3518.56,615 v1(3890,615) ; v1(3890,1535) 3890,2840 4220,3170 4220,3380 4260,3420 v1(4334.36,3420) ; v1(4334.36,3492.5) CON23.47@4334.36,3540 ; v1(4457.5,3492.5) 4885,3492.5 4987.32,3390.18 CON22.25@4987.32,3060.63
  Bottom w5: v1(3890,615) v1(3890,1535) ; v1(4334.36,3420) v1(4334.36,3492.5) v1(4457.5,3492.5)
TS_SCL: CON2.30 CON22.22 CON23.48 | length 4234.4
  Top w5: CON2.30@3413.88,903.37 3413.88,975 3433.88,995 3510,995 3580,1065 v1(3837.5,1065) ; v1(3837.5,1520) 3837.5,2832.5 4190,3185 4190,3395 4267.5,3472.5 v1(4354.04,3472.5) CON23.48@4354.04,3540 ; v1(4440,3472.5) 4440,3420 4450,3410 4897.5,3410 4928.27,3379.23 CON22.22@4928.27,3060.63
  Bottom w5: v1(3837.5,1065) v1(3837.5,1520) ; v1(4354.04,3472.5) v1(4440,3472.5)
TS_SDA: CON2.29 CON22.23 CON23.49 | length 4718
  Top w5: CON2.29@3413.88,761.63 3413.88,685 3503.88,595 v1(3855,595) ; v1(3855,1535) 3855,2835 4200,3180 4200,3390 4265,3455 v1(4373.73,3455) CON23.49@4373.73,3540 ; v1(4462.5,3455) 4462.5,3431.64 4474.14,3420 4910,3420 4947.73,3382.27 4947.73,3112.5 CON22.23@4947.95,3060.63
  Bottom w5: v1(3855,595) v1(3855,1535) ; v1(4373.73,3455) v1(4462.5,3455)
TTL_RXD: CON33.1 U6.14 | length 1795.5
  Top w5: U6.14@868.92,4392.83 868.92,4651.42 887.5,4670 1057.5,4670 1115,4727.5 1295,4727.5 1317.5,4750 v1(1317.5,4915) ; v1(1565,4915) CON33.1@1565,5550
  Bottom w5: v1(1317.5,4915) v1(1565,4915)
TTL_TXD: CON33.4 D3.A | length 657.6
  Top w5: D3.A@1232.5,4905.87 1232.5,5422.5 1265,5455 CON33.4@1265,5550
UART0_RXD: CON4.27 CON32.3 CON33.3 | length 6063.7
  Top w5: CON32.3@900,5550 955,5605 1310,5605 CON33.3@1365,5550 1365,4778.5 1545,4598.5 1545,1960 1585,1920 2145,1920 2155,1910 v1(2610,1910) ; CON4.27@2415.65,1494.11 v1(2492.5,1494.11) ; v1(2660,1505) 2730,1575 v1(2730,1910)
  Bottom w5: v1(2492.5,1494.11) 2649.11,1494.11 v1(2660,1505) ; v1(2610,1910) v1(2730,1910)
UART0_TXD: CON4.28 CON32.2 CON33.2 | length 6227
  Top w5: CON32.2@1000,5550 950,5500 867.5,5500 850,5517.5 850,5595 870,5615 1400,5615 CON33.2@1465,5550 1465,4734.5 1555,4644.5 1555,1970 1595,1930 v1(2595,1930) ; CON4.28@2557.39,1494.11 2619.11,1494.11 2710,1595 v1(2710,1930)
  Bottom w5: v1(2595,1930) v1(2710,1930)
UART1_CTS/SPI2_DIN: CON4.10 CON26.1 | length 1067.9
  Top w5: v1(1760,1767.5) 1760,1765 2365,1765 2375,1775 2445,1775 2480,1740 2480,1700 2508.72,1671.28 CON4.10@2557.39,1671.28
  Bottom w5: CON26.1@1760,1570 v1(1760,1767.5)
UART1_RTS/SPI2_DOUT: CON4.9 CON26.2 | length 797.6
  Top w5: CON26.2@1660,1570 1761.28,1671.28 CON4.9@2415.65,1671.28
UART1_RXD/SPI2_CS0: CON4.8 CON26.5 | length 1474.8
  Top w5: v1(1360,1785) 2450,1785 2490,1745 2490,1705 2504.04,1690.96 CON4.8@2557.39,1690.96
  Bottom w5: CON26.5@1360,1570 v1(1360,1785)
UART1_TXD/SPI2_CLK: CON4.7 CON26.4 | length 1005.8
  Top w5: CON26.4@1460,1570 1580.96,1690.96 CON4.7@2415.65,1690.96
UART2_RXD: CON4.38 R113.1 | length 872.6
  Top w5: R113.1@1951.5,1175 1986.5,1210 2550,1210 2615,1275 2615,1377.5 2596.81,1395.69 CON4.38@2557.39,1395.69
UART2_TXD: CON4.40 R112.1 | length 810.5
  Top w5: R112.1@1951.5,1225 2545,1225 2605,1285 2605,1365 2594,1376 CON4.40@2557.39,1376
UART3_RXD: CON4.37 R119.1 | length 476.5
  Top w5: R119.1@1951.5,1425 1951.8,1425 1981.5,1395.3 CON4.37@2415.65,1395.69
UART3_TXD: CON4.39 R118.1 | length 465.2
  Top w5: R118.1@1951.5,1375 1951.5,1376 CON4.39@2415.65,1376
USB1_DM: CON10.2 E13.1 U6.6 | length 1214.9
  Top w5: E13.1@570,5309 542.5,5281.5 542.5,5025 430,4912.5 430,4657.5 512.5,4575 737.66,4575 742.5,4579.84 U6.6@780.33,4579.84
  Top w10: CON10.2@550.59,5419.84 550.59,5328.41 E13.1@570,5309
USB1_DP: CON10.3 E12.1 U6.7 | length 1236.6
  Top w5: E12.1@505,5309 532.5,5281.5 532.5,5035 420,4922.5 420,4645 500,4565 737.66,4565 742.5,4560.16 U6.7@780.33,4560.16
  Top w10: E12.1@505,5309 525,5329 CON10.3@525,5419.84
USB1_GND: CON6.6 CON6.7 CON6.8 CON6.9 FB3.1 | length 670.1
  Top w25: FB3.1@6720.5,5257.64 CON6.6@6811.81,5257.64 CON6.7@6953.54,5257.64
  Layer 2 w25: CON6.9@6811.81,4962.36 CON6.8@6953.54,4962.36 CON6.7@6953.54,5257.64
USB_DM: CON6.2 E3.1 JP1.1 | length 858.5
  Top w5: E3.1@6689,5070 v1(6715,5070) 6729.41,5084.41 CON6.2@6809.84,5084.41
  Bottom w5: JP1.1@6380,4750 6325.5,4804.5 6325.5,5014.75 6405.25,5094.5 6710.5,5094.5 6715,5090 v1(6715,5070)
USB_DP: CON6.3 E4.1 JP2.1 | length 872.1
  Top w5: E4.1@6689,5125 v1(6715,5125) 6730,5110 CON6.3@6809.84,5110
  Bottom w5: JP2.1@6260,4750 6314.5,4804.5 6314.5,5019.5 6400.5,5105.5 6710.5,5105.5 6715,5110 v1(6715,5125)
VCC3V3: C41.1 C42.1 C43.1 C44.1 D4.A D5.A D6.A FB10.1 FB11.1 R29.2 U6.12 U6.24 U6.39 U6.46 | length 2277.2
  Top w12: v1(552.5,4715) FB10.1@608.5,4715 ; FB11.1@608.5,4480 C41.1@666.5,4430 697.5,4430 729.23,4461.73 U6.12@780.33,4461.73 ; C43.1@772.5,4851 C44.1@822.5,4851 ; U6.46@888.6,4747.17 888.6,4795.87 879.47,4805 832.5,4805 822.5,4815 C44.1@822.5,4851 ; v3(1026.4,4640) 1026.4,4526.1 1065.77,4486.73 U6.24@1065.77,4392.83 D4.A@1220,4392.83 D6.A@1219.5,4442 v1(1187.5,4442) ; v3(1026.4,4705) U6.39@1026.4,4747.17 C42.1@1026.4,4851 997.4,4880 851.5,4880 C44.1@822.5,4851 ; D5.A@1219.5,4592 R29.2@1274.5,4642
  Top w15: v1(552.5,4480) FB11.1@608.5,4480 ; v1(1187.5,4592) D5.A@1219.5,4592
  Top w20: v3(772.5,4820) C43.1@772.5,4851
  Bottom w12: v3(1026.4,4640) v3(1026.4,4705) ; v1(1187.5,4442) v1(1187.5,4592)
  Bottom w20: v1(552.5,4480) v1(552.5,4715) 572.5,4735 737.5,4735 772.5,4770 v3(772.5,4820)
VCC_3V6: C3.2 C5.1 C6.1 C7.1 CON2.2 CON2.4 CON30.2 L1.2 Q8.D R2.2 VCC_3V6.1 | length 1971.8
  Top w5: C6.1@2876,1570 2905,1541 2905,1424 C7.1@2934,1395 C3.2@2934,1344.72 ; VCC_3V6.1@2912.5,1162.5 C5.1@2912.5,1250 2912.5,1323.22 C3.2@2934,1344.72 ; L1.2@3045,1344.72 C3.2@2934,1344.72
  Top w12: C6.1@2876,1570 R2.2@2876,1620
  Top w25: CON30.2@2010,880 2060,930 3138.29,930 CON2.2@3138.29,903.37
  Top w30: Q8.D@1850,833.5 1850,860 1870,880 CON30.2@2010,880
VCC_RTC: BT1.1 CON2.3 CON2.5 | length 3626.8
  Top w5: BT1.1@1113.97,2540 1239,2540 1269,2510 1269,1980.53 1345.53,1904 v1(2095,1904) ; v1(2772.5,715) 2790,732.5 2837.5,732.5 2860,710 3157.97,710 ; CON2.3@3157.97,761.63 3157.97,710 ; CON2.5@3177.66,761.63 3177.66,717.66 3170,710 3157.97,710
  Bottom w5: v1(2095,1904) 2095,1252.5 2632.5,715 v1(2772.5,715)
VCCCORE: C45.1 U6.38 | length 116.8
  Top w10: U6.38@1046.08,4747.17 1046.08,4819.58 C45.1@1077.5,4851
VDD_1V8: C23.2 C24.1 FB27.2 U4.5 | length 172.1
  Top w25: U4.5@4407.4,631 C23.2@4465,631 ; FB27.2@4465,571.5 C23.2@4465,631 ; C24.1@4520,631 C23.2@4465,631
VDD_3V3: C10.2 C11.1 C12.1 C13.1 CON2.8 CON2.10 CON26.3 CON32.1 FB6.2 FB15.1 FB16.1 FB17.1 FB20.1 FB21.1 FB25.1 FB26.2 JP5.1 K4.2 L2.2 Q3.S R6.2 R19.2 R23.2 R85.2 R108.2 R111.1 R117.1 R123.1 VDD_3V3.1 | length 19849.9
  Top w5: R19.2@757.5,1056.5 786.5,1027.5 1315,1027.5 FB6.2@1365,977.5 1364,976.5 R23.2@1364,905 ; FB15.1@2668,4170 2715,4123 2715,4084 R123.1@2686,4055 ; R6.2@3191,1620 C12.1@3191,1570 3220,1541 3220,1450 3249,1421 C10.2@3249,1400 C13.1@3249,1344.72 L2.2@3350,1344.72 ; v1@5200,1490 v1(5205,1490)
  Top w12: v1(5815,4850) FB21.1@5815,4911
  Top w15: R85.2@1860,4819 v3(1860,4850) FB17.1@1860,4881 ; v1(5205,1490) R108.2@5236,1490
  Top w20: FB25.1@549,1620 v3(577.5,1620) ; FB6.2@1365,977.5 v1(1410,977.5) ; R111.1@1951.5,1275 R117.1@1951.5,1325 v3(1977.5,1325) ; v3(4330,571.5) FB26.2@4362.5,571.5
  Top w25: FB16.1@5877,3125 v2(5914,3125)
  Top w30: v3(750,1620) 750,1530 775,1505 1495,1505 CON26.3@1560,1570 ; JP5.1@2130,980 v2(3085,980) ; v2(2595,4170) FB15.1@2668,4170 ; v2(4015,4170) FB20.1@4073,4170
  Top w40: v2(4630,1970) 5187,2527 v2(5187,2917)
  Top w50: v2(3222.5,1147.5) 3451.88,1147.5 3580,1275 v2(4055,1275)
  Bottom w15: v1(1410,977.5) 1457.5,977.5 1505,930 2080,930 JP5.1@2130,980 ; 4630,1490 v1(5205,1490)
  Bottom w20: v3(577.5,1620) v3(750,1620)
  Bottom w30: CON26.3@1560,1570 1665,1465 1932.5,1465 1977.5,1420 v3(1977.5,1325) 1977.5,1132.5 JP5.1@2130,980 ; v2(3085,980) v2(3207,980)
  Bottom w40: CON32.1@1100,5550 1100,4925 1175,4850 1895,4850 ; v3(1860,4850) 1895,4850 ; v2(2595,4170) 2595,4850 ; v2(4015,4170) 4015,4850 ; v2(4055,1275) 4255,1275 ; v3(4330,571.5) 4330,650 4255,725 4255,1275 ; v2(4630,1970) 4630,1490 4630,1330 4575,1275 4255,1275 ; v2(5187,2917) 5187,3125 ; v1(5815,4850) 5150,4850 ; v2(5914,3125) 5187,3125 ; 1895,4850 2595,4850 ; 2595,4850 4015,4850 ; 4015,4850 5150,4850 ; 5150,4850 5150,3850 5030,3730 5030,3497 5187,3340 5187,3125
  other v2: 4085,1275
VDD_AMP: C49.1 C56.1 C57.1 FB14.2 U7.6 | length 300.2
  Top w15: FB14.2@3119,1919 C49.1@3170,1919 C56.1@3220,1919
  Top w20: U7.6@3188.39,2032.8 3252.2,2032.8 3282.5,2002.5 C57.1@3282.5,1910
VDDIO_CSI: C89.1 CON29.2 JP5.3 | length 473.5
  Top w12: CON29.2@2055,390 2055,435 2105,485 C89.1@2105,536 2148.5,536 2162.5,550 2162.5,640.5 2130,673 JP5.3@2130,780
VDDIO_CSI0: CON2.6 JP5.2 | length 1130.7
  Top w10: v1(3177.66,863) CON2.6@3177.66,903.37
  Top w12: JP5.2@2130,880 2190,820 v1(2993,820)
  Bottom w12: v1(2993,820) 3115,820 3158,863 v1(3177.66,863)
VPHY: C37.1 FB10.2 U6.3 | length 174.6
  Top w9: FB10.2@666.5,4715 C37.1@666.5,4665 696.4,4665 722.5,4638.9 U6.3@780.33,4638.9
VPLL: C40.1 FB11.2 U6.8 | length 168.2
  Top w10: FB11.2@666.5,4480 C40.1@666.5,4530 707.03,4530 717.5,4540.47 U6.8@780.33,4540.47
VREGIN: C38.1 C39.1 FB9.1 U6.40 | length 218
  Top w10: FB9.1@872.5,4851 C38.1@922.5,4851 C39.1@972.5,4851 1006.71,4816.79 U6.40@1006.71,4747.17
WIFI_3V3: C17.2 C18.1 C19.1 C20.1 FB18.1 FB19.1 FB22.1 FB23.1 L3.2 R9.2 WIFI_3V3.1 | length 4959.4
  Top w5: C20.1@5670,4473.5 5699,4502.5 5795,4502.5 5824,4531.5 R9.2@5850,4531.5 C19.1@5900,4531.5
  Top w40: FB18.1@3583,4115 v2(3620,4115) ; FB23.1@4981,4073 v2(5048,4073) v2(5260,4073) ; WIFI_3V3.1@5411.6,4371.6 C18.1@5515,4371.6 5515,4073 ; v2(5425,4073) 5515,4073 ; FB19.1@5877,2495 v2(5910,2495) ; v2(6055,2495) 6055,4018 6000,4073 FB22.1@5735,4073 5515,4073
  Bottom w40: v2(3620,4115) 3875,4115 3945,4045 5020,4045 v2(5048,4073) ; v2(5260,4073) v2(5425,4073) ; v2(5910,2495) v2(6055,2495)
WIFI_DM: CON20.12 JP1.3 | length 1530.7
  Top w5: CON20.12@5620.87,3855.16 5664.84,3855.16 5670,3850 v1(5670,3835)
  Bottom w5: v1(5670,3835) 5638.5,3835 5630.5,3843 5630.5,3865.5 5640,3875 6285,3875 6325.5,3915.5 6325.5,4540.5 6335,4550 JP1.3@6380,4550
WIFI_DP: CON20.14 JP2.3 | length 1515.1
  Top w5: v1(5575,3835.47) CON20.14@5620.87,3835.47
  Bottom w5: v1(5575,3835.47) 5612.47,3835.47 5619.5,3842.5 5619.5,3870.5 5635,3886 6279.5,3886 6314.5,3921 6314.5,4540.5 6305,4550 JP2.3@6260,4550
WIFI_EN: CON3.42 R10.2 | length 5139.7
  Top w5: v1(3037,3205) 3037,2300 3052,2285 3197.03,2285 3217.03,2305 CON3.42@3217.03,2380.14 ; v1(3037,3375) 3037,3862 3100,3925 3750,3925 3765,3940 3765,4435 3907.5,4577.5 5707.5,4577.5 5720,4565 R10.2@5720,4531.5
  Bottom w5: v1(3037,3205) v1(3037,3375)
WIFI_INT: CON3.41 CON12.14 CON17.14 R48.2 | length 6936.8
  Top w5: CON12.14@3059.41,4229.29 v1(3059.41,4295) ; 3217,2625.03 v1(3217,2676.5) ; v1(3217,3906) 3752.5,3906 3782.5,3936 v1(3782.5,4295) 3782.5,4370 3797.5,4385 4453.17,4385 4460.67,4377.5 CON17.14@4460.67,4230.32 ; CON3.41@3217.03,2521.87 3217.03,2625 ; R48.2@5859,2910 v1(5885,2910)
  Bottom w5: v1(3059.41,4295) v1(3782.5,4295) ; v1(3217,3906) v1(3217,2676.5) 5867.5,2676.5 5885,2694 v1(5885,2910)
WIFI_RST: CON3.38 CON12.13 CON17.13 R49.1 | length 5696.1
  Top w5: v1(3059.41,3990) CON12.13@3059.41,4087.55 ; CON3.38@3256.4,2380.14 v1(3256.4,2421) ; v1(3910,2462.5) 3910,2580 3930,2600 v1(4260,2600) v1(4260,3390) ; v1(4460.67,3990) CON17.13@4460.67,4088.58 ; v1(5465,2325) R49.1@5465,2351
  Bottom w5: v1(3059.41,3990) 4260,3990 ; v1(3256.4,2421) 3256.4,2446.4 3280,2470 3902.5,2470 v1(3910,2462.5) ; v1(4260,2600) 5455,2600 5465,2590 v1(5465,2325) ; v1(4260,3390) 4260,3990 ; v1(4460.67,3990) 4260,3990
pads on no net: BT1.3 BT1.4 CON1.5 CON1.7 CON1.11 CON1.13 CON1.17 CON1.19 CON1.21 CON1.25 CON1.27 CON1.31 CON1.33 CON1.37 CON1.41 CON1.42 CON1.43 CON1.44 CON2.1 CON2.9 CON2.51 CON2.52 CON2.53 CON2.54 CON3.51 CON3.52 CON3.53 CON3.54 CON4.41 CON4.42 CON4.43 CON4.44 CON6.4 CON9.14 CON9.15 CON10.4 CON12.12 CON12.17 CON12.18 CON12.19 CON12.22 CON12.23 CON12.24 CON12.33 CON12.34 CON12.41 CON12.42 CON12.43 CON12.44 CON13.8 CON13.11 CON13.12 CON13.15 CON13.16 CON13.19 CON13.22 CON13.33 CON13.34 CON13.41 CON13.42 CON13.43 CON13.44 CON14.11 CON14.12 CON15.21 CON15.22 CON15.23 CON15.24 CON16.1 CON16.3 CON16.5 CON16.7 CON16.9 CON16.11 CON16.13 CON16.15 CON16.16 CON16.17 CON16.18 CON16.19 CON16.20 CON16.21 CON16.22 CON16.23 CON16.24 CON17.12 CON17.17 CON17.18 CON17.19 CON17.22 CON17.23 CON17.24 CON17.33 CON17.34 CON17.41 CON17.42 CON17.43 CON17.44 CON18.11 CON18.12 CON19.21 CON19.22 CON19.23 CON19.24 CON20.21 CON20.22 CON20.23 CON20.24 CON21.1 CON21.3 CON21.5 CON21.7 CON21.9 CON21.11 CON21.13 CON21.15 CON21.16 CON21.17 CON21.18 CON21.19 CON21.20 CON21.21 CON21.22 CON21.23 CON21.24 CON22.18 CON22.19 CON23.5 CON23.6 CON23.43 CON23.44 CON23.45 CON23.46 CON24.3 CON24.5 CON24.8 CON24.9 CON24.18 CON25.15 CON25.17 CON25.19 CON25.20 CON29.4 CON29.23 CON29.24 CON29.25 CON29.26 CON29.27 CON29.28 CON29.29 CON29.30 CON29.31 CON29.32 CON29.33 CON29.34 CON29.35 CON29.36 CON29.37 CON29.38 H1.1 H2.1 H3.1 H4.1 K1.3 K1.4 K2.3 K2.4 K3.3 K3.4 K4.3 K4.4 K5.3 K5.4 K6.3 K6.4 K7.3 K7.4 K8.3 K8.4 K9.3 K9.4 MK1.1 MK2.1 SH1.1 SH2.1 SH3.1 SH4.1 SH5.1 SH6.1 U4.4 U6.15 U6.16 U6.17 U6.18 U6.19 U6.20 U6.21 U6.25 U6.26 U6.29 U6.30 U6.31 U6.32 U6.33 U6.43 U6.44 U6.45
copper on no net: | length 134
  Top w12: 1740,714 1740,746.5 ; 1740,776 1740,746.5 ; 1812,746.5 1740,746.5

## Polygon pours and split planes (outlines as drawn)
GND on Bottom (solid, remove dead copper, pour order 0): 45,5650 10,5615 10,240 40,210 7015,210 7050,245 7050,5615 7015,5650
GND on Layer 2 (solid, remove dead copper, pour order 1): 45,5650 10,5615 10,240 40,210 7015,210 7050,245 7050,5615 7015,5650
GND on Layer 1 (solid, remove dead copper, pour order 2): 45,5650 10,5615 10,240 40,210 7015,210 7050,245 7050,5615 7015,5650
GND on Top (solid, remove dead copper, pour order 3): 45,5650 10,5615 10,240 40,210 7015,210 7050,245 7050,5615 7015,5650

## Keep-outs
Top:
  region: 4450,5410 4660,5410 4660,5330 4450,5330 4450,5410
  region: 3220,2000 3155,2000 3155,1965 3220,1965 3220,2000
  region: 3295,1420 3295,1360 3405,1360 3405,1420 3295,1420
  region: 5400,5580 6060,5580 6060,5010 5400,5010 5400,5580
  region: 3255,5405 3255,5330 3050,5330 3050,5405 3255,5405
  region: 3220,2075 3155,2075 3155,2015 3220,2015 3220,2075
  region: 3100,1420 2990,1420 2990,1360 3100,1360 3100,1420
  region: 3395,2075 3330,2075 3330,1965 3395,1965 3395,2075
  region: 2400,5570 1750,5570 1750,5010 2400,5010 2400,5570
  region: 5635,4427.5 5690,4427.5 5690,4315 5635,4315 5635,4427.5
  region: 6750,5150 6870,5150 6870,5010 6750,5010 6750,5150
  region: 490,5480 490,5360 610,5360 610,5480 490,5480
  region: 3255,5550 3255,5470 3050,5470 3050,5550 3255,5550
  region: 4660,5550 4450,5550 4450,5470 4660,5470 4660,5550
Layer 1:
  region: 5400,5580 6060,5580 6060,5010 5400,5010 5400,5580
  region: 2400,5570 1750,5570 1750,5010 2400,5010 2400,5570
Layer 2:
  region: 2400,5570 1750,5570 1750,5010 2400,5010 2400,5570
  region: 5400,5580 6060,5580 6060,5010 5400,5010 5400,5580
Bottom:
  region: 5400,5580 6060,5580 6060,5010 5400,5010 5400,5580
  region: 1750,5570 1750,4920 2310,4920 2310,5570 1750,5570
Keep-Out Layer:
  the board outline again, w5

## Other copper
Top:
  region net NETD2_2: 6220,5100 6165,5100 6165,4960 6110,4960 6110,4915 6220,4915 6220,5100
  region net POWER_IN: 3235,1655 3235,1715 3190,1760 2920,1760 2920,1795 3215,1795 3270,1740 3270,1690 3330,1690 3330,1655 3235,1655
  region net NETL1_1: 3070,1515 3070,1455 2990,1455 2990,1415 3100,1415 3100,1515 3070,1515
  region net NETD2_2: 6110,4005 6170,4005 6170,1635 6110,1635 6110,4005
  region net NETC16_1: 6860,5065 6750,5065 6720,5035 6670,5035 6670,4990 6590,4990 6570,5010 6455,5010 6435,4990 6255,4990 6255,4955 6435,4955 6455,4935 6675,4935 6760,5020 6860,5020 6860,5065
  region net NETC15_1: 3365,1750 3365,1575 3410,1575 3410,1750 3365,1750
  region net LCD_POWER: 3454.2,3580 3327.5,3580 3327.5,3340 3454.2,3340 3454.2,3580
  region net POWER_IN: 3190,3375 3127.5,3375 3127.5,3235 3190,3235 3190,3375
  region net WIFI_3V3: 5485,4410 5485,4100 5405,4100 5405,4052.5 5760,4052.5 5760,4100 5545,4100 5545,4410 5485,4410
  region net NETC1_2: 6480,1795 6545,1795 6545,1525 6480,1525 6480,1795
  region net NETC36_2: 700,5345 625,5345 595,5375 595,5470 568.5,5470 568.5,5366.5 605,5330 605,5290 700,5290 700,5345
  region net POWER_IN: 1870,774 1870,700 1835,700 1835,645 1965,645 1965,590 2020,590 2020,690 1905,690 1905,774 1870,774
  region net VCC_3V6: 3164,1140 3164,872 3125,872 3125,1120 3110,1135 2875,1135 2875,1185 3120,1185 3164,1140
  region net NETC60_1: 5478,3035 5775,3035 5775,3155 5825,3155 5825,2990 5785,2990 5772,3003 5478,3003 5478,3035
  region net NETL2_1: 3375,1515 3375,1450 3300,1450 3300,1420 3400,1420 3400,1515 3375,1515
  region net NETCON5_1: 6250,5135 6340,5135 6340,5255 6380,5255 6380,5100 6250,5100 6250,5135
  region net POWER_IN: 3190,3325 2960,3325 2915,3280 2915,1655 3025,1655 3025,1695 2965,1695 2965,3225 3005,3265 3190,3265 3190,3325
  region net NETC58_1: 2725,4255 2967,4255 2967,4240 2765,4240 2765,4120 2835,4050 2930,4050 2935,4055 2935,4120 2967,4120 2967,4052 2945,4030 2815,4030 2760,4085 2725,4085 2725,4255
  region net POWER_IN: 3075,1872.5 2920,1872.5 2920,1850 3075,1850 3075,1872.5
  region net POWER_IN: 6570,4445 5985,4445 5985,4382.5 6570,4382.5 6570,4445
  region net VDD_3V3: 4100,1300 4100,1250 4040,1250 4040,1300 4100,1300
  region net NETC26_1: 4443,830 4443,755 4395,755 4395,712.5 4420,712.5 4420,724 4484,724 4484,830 4443,830
  region net VDD_3V3: 3100,1005 3100,960 2105,960 2105,1005 3100,1005
  region net NETC64_1: 5700,2680 5478.5,2680 5478.5,2645 5685,2645 5775,2555 5775,2465 5820,2465 5820,2630 5750,2630 5700,2680
  region net POWER_IN: 4195,410 4245,410 4245,380 4195,380 4195,410
  region net WIFI_3V3: 5690,4490 5595,4490 5595,4410 5470,4410 5470,4315 5635,4315 5635,4455 5690,4455 5690,4490
  region net VDD_3V3: 3235,1415 3235,1295 3192,1295 3192,870 3223,870 3223,1063 3270,1110 3270,1290 3310,1330 3400,1330 3400,1360 3265,1360 3265,1415 3235,1415
  region net NETC70_1: 5589,3960 5705,3960 5705,4020 5772,4020 5772,3908 5589,3908 5589,3960
  region net POWER_IN: 4962.5,3580 5210,3580 5210,3520 5022.5,3520 4962.5,3580
  region net VCC_3V6: 2915,1410 2950,1410 2950,1360 3100,1360 3100,1325 2950,1325 2950,1135 2875,1135 2875,1295 2915,1335 2915,1410
  region net NETC72_1: 4691,4262 4722.5,4262 4722.5,4032.5 4740,4015 5005,4015 5005,3980 4845,3980 4835,3990 4735,3990 4691,4034 4691,4262
  region net POWER_IN: 6235,3580 6570,3580 6570,3520 6235,3520 6235,3580
  region net POWER_IN: 4410,835 4410,780 4260,780 4245,765 4245,535.24 4245.01,534.76 4245.01,350 4264.52,330 4365,330 4365,275 4220,275 4195,300 4195,795 4235,835 4410,835
  region net LCD_POWER: 3225,3310 3220,3305 3220,3280 3225,3275 3310,3275 3380,3345 3325,3345 3290,3310 3225,3310
  region net NETD2_2: 6110,4955 6170,4955 6170,4870 6110,4870 6110,4955
  region net LCD_POWER: 5080,3085 5080,2950 4925,2950 4925,2705 4985,2705 4985,2850 5130,2850 5130,3085 5080,3085
  region net VDD_AMP: 3105,1935 3305,1935 3305,1905 3105,1905 3105,1935
  region net NETC62_1: 3290,4260 3530,4260 3530,4030 3300,4030 3290,4040 3290,4120 3325,4120 3325,4065 3335,4055 3425,4055 3485,4115 3485,4220 3465,4240 3325,4240 3325,4195 3290,4195 3290,4260
  region net POWER_IN: 6480,1920 6570,1920 6570,1840 6480,1840 6480,1920
  region net NETC68_1: 4368,4265 4140,4265 4130,4255 4130,4055 4155,4030 4360,4030 4368,4038 4368,4120 4335,4120 4335,4065 4325,4055 4180,4055 4165,4070 4165,4245 4335,4245 4335,4195 4368,4195 4368,4265
Layer 1:
  region net NETD2_2: 6167,1687 6113,1687 6113,1638 6167,1638 6167,1687
  region net GND: 2230,5110 2280,5110 2280,4980 2230,4980 2230,5110
  region net POWER_IN: 6566,1916 6484,1916 6484,1889 6566,1889 6566,1916
  region net GND: 5880,5110 5940,5110 5940,4980 5880,4980 5880,5110
Layer 2:
  region net NETD2_2: 6167,1686 6113,1686 6113,1638 6167,1638 6167,1686
  region net POWER_IN: 6566,1916 6484,1916 6484,1889 6566,1889 6566,1916
Bottom:
  region net POWER_IN: 4195,410 4245,410 4245,380 4195,380 4195,410
  region net POWER_IN: 6320,3580 5120,3580 5120,3520 6320,3520 6320,3580
  region net LCD_POWER: 4985,2935 5015,2935 5015,2875 4985,2875 4985,2935
  region net NETD2_2: 6110,4920 6170,4920 6170,3945 6110,3945 6110,4920
  region net NETD2_2: 6940,1690 6110,1690 6110,1635 6940,1635 6940,1690
  region net POWER_IN: 4380,830 4305,830 4305,780 4380,780 4380,830
  region net POWER_IN: 6570,1880 6480,1880 6480,4445 6570,4445 6570,1880
  region net POWER_IN: 1875,710 1905,710 1905,645 1875,645 1875,710
  region net LCD_POWER: 3365,3415 3360,3410 3360,3355 3365,3350 3390,3350 3390,3410 3385,3415 3365,3415
Multi-Layer:
  lines w5: 0,159.97 cw(c41.25,158.75) 39.95,200 ; 0,160 0,0 7060,0 7060,160 ; 0,5700 0,5860 7060,5860 7060,5700 ; 0,5700.05 ccw(c42.5,5702.5) 39.98,5660 7020,5660 ; 40,200 7020,200 cw(c7017.5,157.5) 7060,159.95 ; 7020.05,5660 ccw(c7018.75,5701.25) 7060,5700.03
  text "_ _ _V_CUT" at 7031,5672.5 h50
  text "_ _ _V_CUT" at 7060,210 h50